# Altium PCB Ocarina.PcbDoc
Units mm, origin at the board's own origin, x right, y up, seen from the top; angles counter-clockwise.
Board outline 70.25 x 24.75 mm, 2 copper layers (Top Layer, Bottom Layer), stack 1.571 mm thick; 49 components, 40 nets, 176 pads, 40 vias.
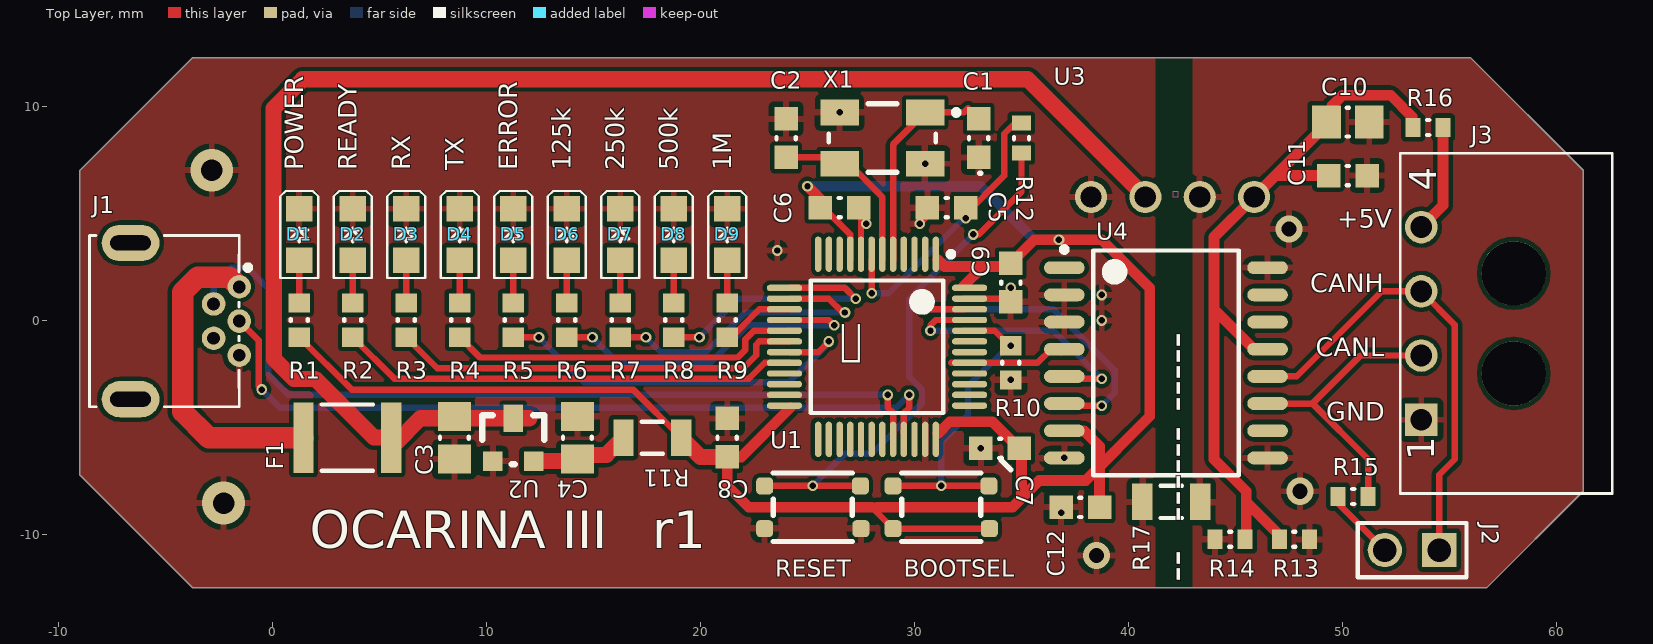
[diagram p0: Top Layer view]
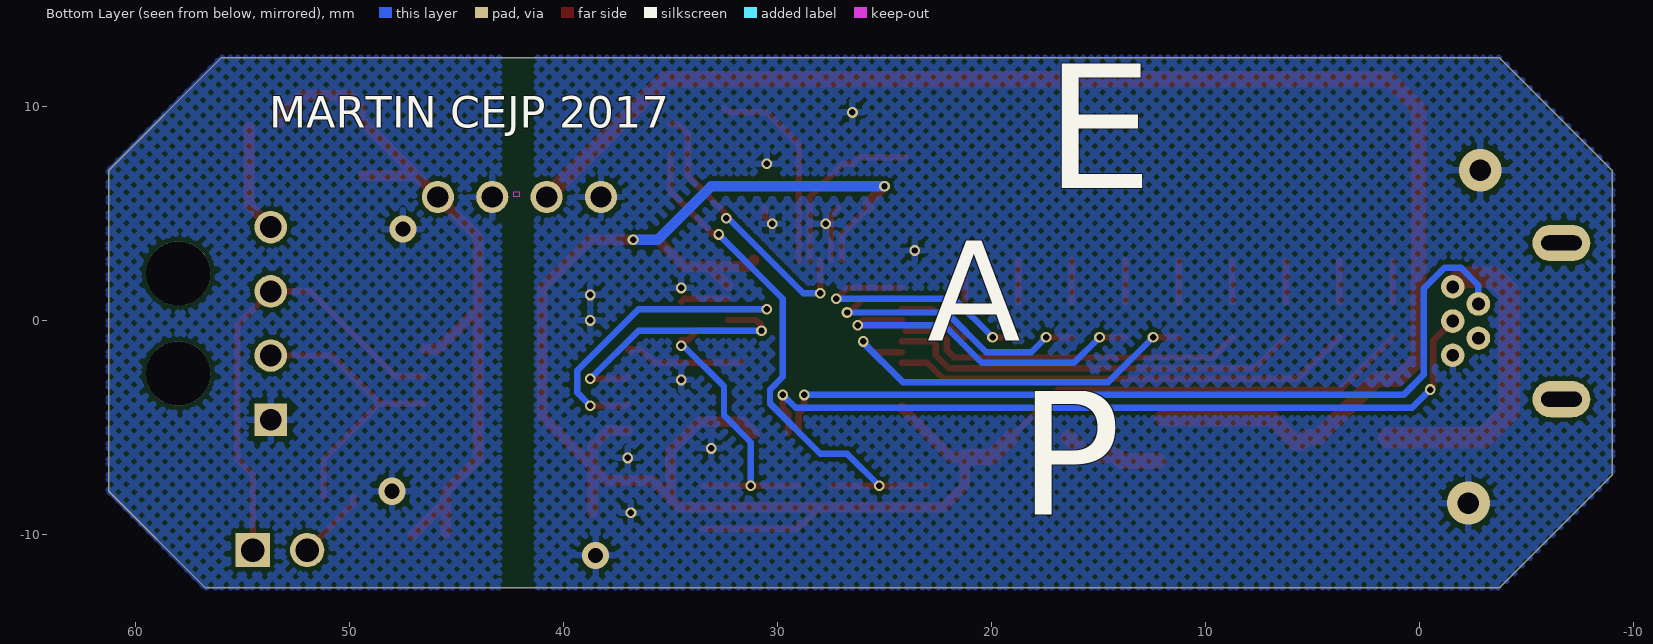
[diagram p1: Bottom Layer view, seen from below]

## Layer stack, top to bottom
Top Solder: solder mask 0.0102, Solder Resist, Dk 3.5
Top Layer: signal copper 0.0356
Dielectric 1: dielectric 1.5, FR-4, Dk 4.8
Bottom Layer: signal copper 0.0356
Bottom Solder: solder mask 0.0102, Solder Resist, Dk 3.5

## Board outline
-3.75,-12.5 -9,-7.25 -9,7 -3.75,12.25 56,12.25 61.25,7 61.25,-8 56.75,-12.5

## Design rules (kind name [scope] priority, off if disabled: settings)
Clearance [All] p1: gap=0.2 ignorepadtopadclearanceinfootprint=FALSE except(0: Arc-Hole Track-Hole SMDPad-Hole THPad-Hole Via-Hole Fill-Hole Poly-Hole Region-Hole Text-Hole)
HoleSize [All] p1: absolutevalues=TRUE maxlimit=6.4 minlimit=0.2 maxpercent=80.000 minpercent=20.000
HoleToHoleClearance [All] p1: gap=0.1 allowstackedmicrovias=TRUE
MinimumSolderMaskSliver [All] p1: minsoldermaskwidth=0.01
PolygonConnect [All] p1: connectstyle=Relief reliefconductorwidth=0.3 reliefentries=4 polygonreliefangle="90 Angle" airgapwidth=0.254
RoutingVias [All] p1: holewidth=0.3 width=0.5 viastyle="Through Hole" minholewidth=0.3 minwidth=0.5 maxholewidth=0.711 maxwidth=1.27
SilkToSilkClearance [All] p1: silktosilkclearance=0.01
SilkToSolderMaskClearance [IsPad] p1: minsilkscreentomaskgap=0.01 clearancetoexposedcopper=TRUE
SolderMaskExpansion [All] p1: expansion=0.102
Width [All] p1: maxlimit=1 minlimit=0.3 preferedwidth=0.3 minimp=50.000000 maximp=50.000000 favimp=50.000000
25 further rules are at their usual default settings.

## Classes and differential pairs
component class 2_IsoCAN: C10 C11 C12 J2 J3 R13 R14 R15 R16 R17 U3 U4
component class 1_Main: BOOTSEL C1 C2 C3 C4 C5 C6 C7 C8 C9 D1 D2 D3 D4 D5 D6 D7 D8 D9 F1 J1 R1 R2 R3 R4 R5 R6 R7 R8 R9 R10 R11 R12 RESET U1 U2 X1

## Components (designator, comment, footprint, x,y, rotation, side; value= is the part's Value field where it differs from the comment)
BOOTSEL "430181038816" BUTTON_4x3x2 31.25,-8.75 r0 top
C1 "18p" CAPC0603(1608)100_M 33,8.5 r90 top value=18pF
C2 "18p" CAPC0603(1608)100_M 24,8.5 r270 top value=18pF
C3 "4.7uF" CAPC0805(2012)155_M 8.5,-5.5 r90 top
C4 "4.7uF" CAPC0805(2012)155_M 14.25,-5.5 r270 top
C5 "100n" CAPC0603(1608)100_M 31.5,5.25 r0 top value=100nF
C6 "100n" CAPC0603(1608)100_M 26.5,5.25 r0 top value=100nF
C7 "100n" CAPC0603(1608)100_M 34,-6 r180 top value=100nF
C8 "100n" CAPC0603(1608)100_M 21.25,-5.5 r90 top value=100nF
C9 "100n" CAPC0603(1608)100_M 34.5,1.75 r270 top value=100nF
C10 "1uF" CAPC0805(2012)145_M 50.25,9.25 r180 top
C11 "100n" CAPC0603(1608)100_M 50.25,6.75 r180 top value=100nF
C12 "100n" CAPC0603(1608)100_M 37.75,-8.75 r0 top value=100nF
D1 "green" 0805LEDG 1.25,4 r90 top
D2 "green" 0805LEDG 3.75,4 r90 top
D3 "yellow" 0805LEDYell 6.25,4 r90 top
D4 "yellow" 0805LEDYell 8.75,4 r90 top
D5 "red" 0805LEDR 11.25,4 r90 top
D6 "blue" 0805LEDB 13.75,4 r90 top
D7 "blue" 0805LEDB 16.25,4 r90 top
D8 "blue" 0805LEDB 18.75,4 r90 top
D9 "blue" 0805LEDB 21.25,4 r90 top
F1 "500 mA" RESC1812(4532)_L 3.5,-5.5 r0 top value="1.02 Ohm"
J1 "651005136521" MOLEX_548190519 -1.55,-0.05 r90 top
J2 "02p" 61300211121 53.25,-10.75 r180 top
J3 "WE-3.00 mm Micro Power Connector 66200411022" 66200411022 53.68,-0.16 r90 top
R1 "470R" RESC0603(1608)_N 1.25,0 r270 top value="470.00 Ohm"
R2 "470R" RESC0603(1608)_N 3.75,0 r270 top value="470.00 Ohm"
R3 "470R" RESC0603(1608)_N 6.25,0 r90 top value="470.00 Ohm"
R4 "470R" RESC0603(1608)_N 8.75,0 r90 top value="470.00 Ohm"
R5 "470R" RESC0603(1608)_N 11.25,0 r90 top value="470.00 Ohm"
R6 "470R" RESC0603(1608)_N 13.75,0 r90 top value="470.00 Ohm"
R7 "470R" RESC0603(1608)_N 16.25,0 r90 top value="470.00 Ohm"
R8 "470R" RESC0603(1608)_N 18.75,0 r90 top value="470.00 Ohm"
R9 "470R" RESC0603(1608)_N 21.25,0 r90 top value="470.00 Ohm"
R10 "10K" RESC0603(1608)_N 34.5,-2 r90 top value="10000.00 Ohm"
R11 "0R1 1%" RESC1206(3216)_L 17.75,-5.5 r0 top value="1.10 Ohm"
R12 "100R" RESC0603(1608)_L 35,8.5 r270 top value="100.00 Ohm"
R13 "500R" RESC0603(1608)_L 47.75,-10.25 r180 top value="120.00 Ohm"
R14 "500R" RESC0603(1608)_L 44.75,-10.25 r0 top value="120.00 Ohm"
R15 "120R" RESC0603(1608)_L 50.5,-8.25 r180 top value="120.00 Ohm"
R16 "0R" RESC0603(1608)_L 54,9 r0 top value="0.00 Ohm"
R17 "1M 1kV" RESC1206(3216)_L 42,-8.5 r0 top value="1000000.00 Ohm"
RESET "430181038816" BUTTON_4x3x2 25.25,-8.75 r0 top
U1 "STM32F042C6T6" STM-LQFP48_M 28.25,-1.25 r270 top locked
U2 "3V3" SOT23m 10.3,-6.59 r0 top
U3 "WE FISM 177920511" FISM_17792XXX1 42.06,5.75 r0 top
U4 "ADM3054BRWZ" SOIC127P1030X265-16N 41.75,-2 r0 top
X1 "ABM3B-12.000MHZ-B2-T" ABRA-ABM3B-4_V 28.5,8.5 r180 top

## Footprints (in the part's own frame and the unit in brackets; to place one, negate y for a bottom-side part, rotate by r counter-clockwise, add the part's x,y. Pads: shape width x height; smd on the part's side, far side on the other; paste and mask are expansions set on the pad)
0805LEDB [mm]
  rect 1.2x1.25 smd: A(-1.2,0) K(1.2,0)
  silkscreen extent -2.03,-0.89 2.03,0.89, body extent -1.01,-0.63 1.01,0.62, height 1.1
0805LEDG [mm]
  rect 1.2x1.25 smd: A(-1.2,0) K(1.2,0)
  silkscreen extent -2.03,-0.89 2.03,0.89, body extent -1.01,-0.63 1.01,0.62, height 1.11
0805LEDR [mm]
  rect 1.2x1.25 smd: A(-1.2,0) K(1.2,0)
  silkscreen extent -2.03,-0.89 2.03,0.89, body extent -1.01,-0.63 1.01,0.62, height 1.1
0805LEDYell [mm]
  rect 1.2x1.25 smd: A(-1.2,0) K(1.2,0)
  silkscreen extent -2.03,-0.89 2.03,0.89, body extent -1.01,-0.62 1.01,0.63, height 1.1
61300211121 [mm] "2 pins, 1 row, straight, gold plating"
  rect 1.6x1.6 hole 1.1: 1(-1.27,0)
  round 1.6 hole 1.1: 2(1.27,0)
  silkscreen extent -2.54,-1.27 2.54,1.27, body extent -2.54,-1.27 2.54,1.27, height 8.57
66200411022 [mm] "Single row Right angle header With plastic peg 04p"
  rect 1.52x1.52 hole 1.02: 1(-4.5,0)
  round 1.52 hole 1.02: 2(-1.5,0) 3(1.5,0) 4(4.5,0)
  round 3 hole 3 unplated: ""(-2.34,-4.32) ""(2.34,-4.32)
  silkscreen extent -7.95,-8.92 7.95,0.98, body extent -7.82,-8.92 7.83,0.98, height 5.59
ABRA-ABM3B-4_V [mm] "SMD, 4-Leads, Body 5x3.2mm"
  rect 1.8x1.2 smd: 1(-2,-1.2) 2(2,-1.2) 3(2,1.2) 4(-2,1.2)
  silkscreen extent -3.58,-1.6 2.5,1.6, body extent -2.5,-1.59 2.5,1.59, height 1.13
BUTTON_4x3x2 [mm]
  rrect50% 0.8x0.8 smd: 1(-2.25,1) 2(2.225,1) 3(-2.25,-1) 4(2.25,-1)
  silkscreen extent -1.85,-1.6 1.85,1.6, body extent -1.85,-1.6 1.85,1.6, height 2
CAPC0603(1608)100_M [mm] "Chip Capacitor, Body 1.6x0.8mm, Height 1.0mm, IPC Low Density"
  rect 1.1x1.1 smd: 1(-0.9,0) 2(0.9,0)
  silkscreen extent -0.05,-0.45 0.05,0.45, body extent -0.87,-0.47 0.88,0.48, height 1
CAPC0805(2012)145_M [mm] "Chip Capacitor, Body 2.0x1.2mm, Height 1.45mm, IPC Low Density"
  rect 1.35x1.55 smd: 1(-1,0) 2(1,0)
  silkscreen extent -0.05,-0.67 0.05,0.67, body extent -1.1,-0.72 1.1,0.72, height 1.45
CAPC0805(2012)155_M [mm] "Chip Capacitor, Body 2.0x1.2mm, Height 1.55mm, IPC Low Density"
  rect 1.35x1.55 smd: 1(-1,0) 2(1,0)
  silkscreen extent -0.05,-0.67 0.05,0.67, body extent -1.1,-0.72 1.1,0.72, height 1.55
FISM_17792XXX1 [mm]
  round 1.5 hole 1: 1(-3.81,0) 2(-1.27,0) 3(1.27,0) 4(3.81,0)
  Keep-Out Layer region: 0,0 0.254,0 0.254,0.254 0,0.254
  body extent -5.75,-1.25 5.75,4.75, height 10
MOLEX_548190519 [mm] "5 pins"
  round 1.1 hole 0.6: 1(1.6,0) 2(0.8,1.2) 3(0,0) 4(-0.8,1.2) 5(-1.6,0)
  oval 1.7x2.7 hole 0.7 slot 1.9 at 90 deg: Shell(-3.65,5.08) Shell(3.65,5.08)
  silkscreen extent -4,-0.52 4,7, body extent -4.07,-0.13 4.07,8.7, height 3.91
RESC0603(1608)_L [mm] "Chip Resistor, Body 1.6x0.8mm, IPC High Density"
  rect 0.7x0.9 smd: 1(-0.7,0) 2(0.7,0)
  silkscreen extent -0.05,-0.35 0.05,0.35, body extent -0.85,-0.47 0.85,0.47, height 0.6
RESC0603(1608)_N [mm] "Chip Resistor, Body 1.6x0.8mm, IPC Medium Density"
  rect 0.9x1 smd: 1(-0.8,0) 2(0.8,0)
  silkscreen extent -0.05,-0.4 0.05,0.4, body extent -0.85,-0.47 0.85,0.47, height 0.6
RESC1206(3216)_L [mm] "Chip Resistor, Body 3.2x1.6mm, IPC High Density"
  rect 0.95x1.7 smd: 1(-1.35,0) 2(1.35,0)
  silkscreen extent -0.5,-0.75 0.5,0.75, body extent -1.67,-0.87 1.67,0.87, height 0.75
RESC1812(4532)_L [mm] "Chip Resistor, Body 4.5x3.2mm, IPC High Density"
  rect 0.95x3.3 smd: 1(-2.05,0) 2(2.05,0)
  silkscreen extent -1.2,-1.55 1.2,1.55, body extent -2.35,-1.7 2.35,1.7, height 0.71
SOIC127P1030X265-16N [mm] "SOIC, 16-Leads, Body 10,30x7,50mm, Pitch 1,27mm, IPC Medium Density"
  oval 1.9x0.6 smd: 1(-4.75,4.445) 2(-4.75,3.175) 3(-4.75,1.905) 4(-4.75,0.635) 5(-4.75,-0.635) 6(-4.75,-1.905) 7(-4.75,-3.175) 8(-4.75,-4.445) 9(4.75,-4.445) 10(4.75,-3.175) 11(4.75,-1.905) 12(4.75,-0.635) 13(4.75,0.635) 14(4.75,1.905) 15(4.75,3.175) 16(4.75,4.445)
  silkscreen extent -4.87,-5.25 3.4,5.42, body extent -3.8,-5.25 3.8,5.25, height 2.65
SOT23m [mil]
  rect 35.98x35.98 smd: 1(0,0)
  rect 36x36 smd: 2(74.8,0)
  rect 36x50 smd: 3(37.4,78.74)
  silkscreen extent -20,-6 94,84, body extent -20,-7 95,91, height 37
STM-LQFP48_M [mm] "QFP, 48-Leads, Body 7x7mm, Pitch 0.5mm, IPC Low Density"
  oval 1.65x0.3 smd: 1(-4.325,2.75) 2(-4.325,2.25) 3(-4.325,1.75) 4(-4.325,1.25) 5(-4.325,0.75) 6(-4.325,0.25) 7(-4.325,-0.25) 8(-4.325,-0.75) 9(-4.325,-1.25) 10(-4.325,-1.75) 11(-4.325,-2.25) 12(-4.325,-2.75) 25(4.325,-2.75) 26(4.325,-2.25) 27(4.325,-1.75) 28(4.325,-1.25) 29(4.325,-0.75) 30(4.325,-0.25) 31(4.325,0.25) 32(4.325,0.75) 33(4.325,1.25) 34(4.325,1.75) 35(4.325,2.25) 36(4.325,2.75)
  oval 0.3x1.65 smd: 13(-2.75,-4.325) 14(-2.25,-4.325) 15(-1.75,-4.325) 16(-1.25,-4.325) 17(-0.75,-4.325) 18(-0.25,-4.325) 19(0.25,-4.325) 20(0.75,-4.325) 21(1.25,-4.325) 22(1.75,-4.325) 23(2.25,-4.325) 24(2.75,-4.325) 37(2.75,4.325) 38(2.25,4.325) 39(1.75,4.325) 40(1.25,4.325) 41(0.75,4.325) 42(0.25,4.325) 43(-0.25,4.325) 44(-0.75,4.325) 45(-1.25,4.325) 46(-1.75,4.325) 47(-2.25,4.325) 48(-2.75,4.325)
  silkscreen extent -4.45,-3.1 3.1,3.58, body extent -3.5,-3.5 3.5,3.5, height 1.6

## Part data
BOOTSEL RESET: library part "WS-TASV, 430181038816", "WS-TASV 4.5x4.5 mm SMD", Manufacturer="Wurth Elektronik", ComponentLink1Description=Manufacturer, ComponentLink1URL=http://www.we-online.de, ComponentLink2Description=Datasheet, ComponentLink2URL=http://katalog.we-online.de/em/datasheet/430181038816.pdf, Created by="Baojun Chen", Created Date=Dec.2015, partNo=430181038816
C1 C2: library part CMP-1035-00733-1, "CAP 18pF 10V ±10% 0603 (1608 Metric) Thickness 1mm SMD", Case-EIA=0603, Case-Metric=1608, Rated Voltage="10 V", Tolerance=±10%, Max Thickness="1 mm", Technology=SMT
C3 C4: library part CMP-1036-04892-1, "CAP 4.7uF 16V ±20% 0805 (2012 Metric) Thickness 1.55mm SMD", Case-EIA=0805, Case-Metric=2012, Rated Voltage="16 V", Tolerance=±20%, Max Thickness="1.55 mm", Technology=SMT
C5 C6 C7 C8 C9 C11 C12: library part CMP-1035-02576-1, "CAP 100nF 6.3V ±10% 0603 (1608 Metric) Thickness 1mm SMD", Case-EIA=0603, Case-Metric=1608, Rated Voltage="6.3 V", Tolerance=±10%, Max Thickness="1 mm", Technology=SMT
C10: library part CMP-1036-04748-1, "CAP 1uF 16V ±20% 0805 (2012 Metric) Thickness 1.45mm SMD", Case-EIA=0805, Case-Metric=2012, Rated Voltage="16 V", Tolerance=±20%, Max Thickness="1.45 mm", Technology=SMT
D1 D2: library part LEDG_0805
D3 D4: library part LEDYell_0805
D5: library part LEDR_0805
D6 D7 D8 D9: library part LEDB_0805
F1: library part CMP-1016-00152-1, "1R02 0.75W 1% 1812 (4532 Metric)  SMD", Case-EIA=1812, Case-Metric=4532, Power="0.75 W", Tolerance="1 %", Technology=SMT
J1: "WR-COM Mini USB 2.0 Type B Horizontal 5 Contacts", ComponentLink1Description=Manufacturer, ComponentLink1URL=http://www.we-online.de, ComponentLink2Description=Datasheet, ComponentLink2URL=http://katalog.we-online.de/em/datasheet/651005136521.pdf, PartNumber=651005136521, Published="June 2016", Publisher="Wurth Elektronik"
J2: library part 61300211121, "WR-PHD 2.54 mm THT Pin Header, 02p", ComponentLink1Description=Manufacturer, ComponentLink1URL=http://www.we-online.de, ComponentLink2Description=Datasheet, ComponentLink2URL=http://katalog.we-online.de/em/datasheet/6130xx11121.pdf, PartNumber=61300211121, PinNumber=02p, PublishedDate="July 2016", Publisher="Wurth Elektronik"
J3: "WR-MPC3 3.00 mm Male Single Row Angled Header", Manufacturer="W¨¹rth Elektronik eiSos GmbH", partNo=66200411022, ComponentLink1 Description=Manufacturer, ComponentLink1URL=http://www.we-online.com, ComponentLink2 Description=Datasheet, ComponentLink2URL=http://katalog.we-online.de/em/datasheet/6620xx11022.pdf, Created by="Karrer Zheng", Created Date="28 August 2013", NoPins=04
R1 R2 R3 R4 R5 R6 R7 R8 R9: library part CMP-1012-00066-1, "470R 0.1W 5% 0603 (1608 Metric)  SMD", Case-EIA=0603, Case-Metric=1608, Power="0.1 W", Tolerance="5 %", Technology=SMT
R10: library part CMP-1012-00098-1, "10K 0.1W 5% 0603 (1608 Metric)  SMD", Case-EIA=0603, Case-Metric=1608, Power="0.1 W", Tolerance="5 %", Technology=SMT
R11: library part CMP-1014-00003-1, "0R1 0.25W 1% 1206 (3216 Metric)  SMD", Case-EIA=1206, Case-Metric=3216, Power="0.25 W", Tolerance="5 %", Technology=SMT
R12: library part CMP-1012-00050-1, "100R 0.1W 5% 0603 (1608 Metric)  SMD", Case-EIA=0603, Case-Metric=1608, Power="0.1 W", Tolerance="5 %", Technology=SMT
R13 R14 R15: library part CMP-1012-00052-1, "120R 0.1W 5% 0603 (1608 Metric)  SMD", Case-EIA=0603, Case-Metric=1608, Power="0.1 W", Tolerance="5 %", Technology=SMT
R16: library part CMP-1012-00052-1, "0R 0.1W 5% 0603 (1608 Metric)  SMD", Case-EIA=0603, Case-Metric=1608, Power="0.1 W", Tolerance="5 %", Technology=SMT
R17: library part CMP-1014-00146-1, "1M 0.25W 5% 1206 (3216 Metric)  SMD", Case-EIA=1206, Case-Metric=3216, Power="0.25 W", Tolerance="5 %", Technology=SMT
U1: library part CMP-0304-00103-1, "ARM Cortex-M0 32-bit MCU, 32 KB Flash, 6 KB Internal RAM, 38 I/Os, 48-Pin LQFP, -40 to 85 degC, Tray", I/Os (High Current)=38, Operating Frequency(F) (Processor speed) (MHz)=48, Package Description="48-Pin Low Profile Quad Flat Package, Body 7 x 7 mm, Pitch 0.5 mm", Package Reference=LQFP48, Supply Voltage(Vcc) min (V)=2, ComponentLink1Description="Manufacturer URL", ComponentLink1URL=http://www.st.com/, ComponentLink2Description=Datasheet, ComponentLink2URL=http://www.st.com/st-web-ui/static/active/en/resource/technical/document/datasheet/DM00105814.pdf, Core="ARM Cortex-M0", DatasheetVersion="Rev. 5", FLASH Size (Prog) (kB)=32, Internal RAM Size (kB)=6, Mounting Technology="Surface Mount", Packing=Tray
U2: library part LM1117DT-3.3NOPB, "1.8V Voltage reference", Alias=MCP1700, Suplier=Farnell
U3: library part 177920511
X1: library part CMP-1688-00007-1, "Ceramic SMD Crystal, 12 MHz, +/- 20 ppm, 70 Ohm, -20 to 70 degC, 4-Pin SMD, RoHS, Tape and Reel", Case\Package=TO-263-4, Dropout Voltage="2 V", Max Input Voltage="25 V", Max Operating Temperature="125 degC", Max Ouput Current="1.5 A", Min Input Voltage="7 V", Min Operating Temperature="0 degC", Nominal Output Voltage="5 V", Package Quantity=500, ComponentLink1Description="Manufacturer URL", ComponentLink1URL=http://www.abracon.com/, ComponentLink2Description=Datasheet, ComponentLink2URL=http://www.abracon.com/Resonators/abm3b.pdf, DatasheetVersion=Aug-15, Mount="Surface Mount", Output Current="1.5 A", Outputs=1, Output Voltage="5 V", PackageDescription="4-Pin Surface Mount Device, Body 5 x 3.2 mm", PackageReference=ABM3B, Packaging="Tape and Reel", Pins=3, Radiation Hardening=No, REACH SVHC="No SVHC", RoHSCompliant=true, Weight="0.050897 oz"

## Via types
v1: diameter 0.5, hole 0.3, Top Layer to Bottom Layer, 35 vias
v2: diameter 1.27, hole 0.711, Top Layer to Bottom Layer, 3 vias
v3: diameter 2, hole 1, Top Layer to Bottom Layer, 2 vias

## Nets (pads, with @x,y where several pads share a name; then routed paths per layer and width w, separated by ;. In a path a pad name is that pad's centre, name@x,y a point inside that pad or via, vN(x,y) a via of type N, cw(c..) or ccw(c..) an arc to the next point about the centre after c; other vN are vias at no path point)
+3V3: BOOTSEL.3 BOOTSEL.4 C6.1 C7.1 C8.1 C9.1 C12.2 R1.2 R11.2 U1.1 U1.9 U1.24 U1.36 U1.48 U4.7 | length 102.8
  Top Layer w0.3: R1.2 3.7,-3.25 16.85,-3.25 R11.2 ; C6.1@25.75,5.25 27,4 U1.9@27,2.8 ; 28,-8.75 28.75,-9.5 BOOTSEL.3@29,-9.5 ; BOOTSEL.3@29,-9.675 29.075,-9.75 BOOTSEL.4
  Top Layer w0.5: U1.24@24.2,-4.1 21.9,-6.4 C8.1 21.25,-7.75 22.25,-8.75 28,-8.75 ; v1(25,6.25) 25.75,5.5 C6.1@25.75,5.25 ; 28.25,-8.75 34.576,-8.75 35.826,-7.5 38,-7.5 41,-4.5 41,1.5 38.75,3.75 v1(36.75,3.75) 35.6,3.75 C9.1 34.35,2.5 33.2,2.5 ; U1.36@31.1,-5.3 31.65,-4.75 33.65,-4.75 C7.1 34.9,-6.056 35,-6.156 35,-8.25 ; U1.1@31.1,2.8 31.4,2.5 33.2,2.5 ; U1.48@32.3,1.6 33.2,2.5 ; U4.7 37.925,-5.175 38.65,-5.9 C12.2@38.65,-9
  Top Layer w0.75: R11.2 20,-6.4 C8.1
  Bottom Layer w0.5: v1(25,6.25) 33.1,6.25 35.6,3.75 v1(36.75,3.75)
BOOTSEL: BOOTSEL.1 BOOTSEL.2 R10.2 U1.44 | length 14.7
  Top Layer w0.3: BOOTSEL.1 v1(31.25,-7.75) BOOTSEL.2 ; U1.44@32.3,-0.5 33.75,-0.5 34.2,-0.95 R10.2@34.5,-0.95
  Bottom Layer w0.3: v1(31.25,-7.75) 31.25,-5.707 32.5,-4.457 32.5,-3.1 v1@34.4,-1.2
  other v1: 34.5,-1.2
CAN_RX: U1.45 U4.5 | length 12.6
  Top Layer w0.3: v1(30.75,-0.5) 30.75,-0.25 31,0 U1.45@32.3,0 ; U4.5 37.115,-2.75 v1(38.75,-2.75)
  Bottom Layer w0.3: v1(30.75,-0.5) 36.5,-0.5 v1(38.75,-2.75)
CAN_TX: U1.46 U4.6 | length 15.5
  Top Layer w0.3: v1(30.5,0.5) U1.46@32.3,0.5 ; U4.6 37.095,-4 v1(38.75,-4)
  Bottom Layer w0.3: v1(30.5,0.5) 36.5,0.5 39.35,-2.35 39.35,-3.4 v1(38.75,-4)
CANH: J2.1 J3.3 U4.12 | length 21.9
  Top Layer w0.3: U4.12 47.865,-2.635 51.84,1.34 J3.3 55.25,-0.23 55.25,-6.5 54.52,-7.23 J2.1
CANL: J3.2 R15.1 U4.11 | length 13.5
  Top Layer w0.3: U4.11 48.595,-3.905 ; R15.1 51.2,-6.51 48.595,-3.905 ; J3.2 50.84,-1.66 48.595,-3.905
GND: C1.1 C2.1 C3.1 C4.1 C5.1 C6.2 C7.2 C8.2 C9.2 C12.1 D1.K D2.K D3.K D4.K D5.K D6.K D7.K D8.K D9.K J1.5 R10.1 R17.1 RESET.3 RESET.4 U1.8 U1.23 U1.35 U1.47 U2.1 U3.1 U4.2 U4.3 U4.8 X1.2 X1.4 | length 5.8
  Top Layer w0.3: C6.2@27.15,5.25 27.5,4.9 U1.8@27.5,2.8 ; v1(30.25,4.5) 30.6,4.85 C5.1 ; U1.47@32.3,1 34.35,1 C9.2
  other v1: 36.85,-9 37,-6.445 33.1,-6 34.5,-2.8 38.75,-0.019 38.75,1.171 34.5,1.5 23.587,3.25 27.75,4.5 30.5,7.3 26.5,9.7
  other v2: 38.5,-11
  other v3: -2.284,-8.556 -2.837,7
ISO5V: C10.2 C11.2 R13.2 R14.2 R16.1 U3.4 U4.13 | length 35.5
  Top Layer w0.5: R14.2@45.5,-9.95 45.5,-8 44,-6.5 44,0.5 ; 45.5,-8.5 R13.2@47.05,-10.05 ; U4.13 45.865,-1.365 44,0.5 ; C11.2 46.87,6.75 ; R16.1@53.25,9.25 53.25,9.5 52.25,10.5 50,10.5 49.5,10 49.5,9.3 49.45,9.25 49.37,9.25 46.87,6.75 ; 44,0.5 44,3.88 U3.4 46.87,6.75
ISO_SENSE: U1.41 U4.4 | length 5.7
  Top Layer w0.3: 31.718,-2 35.75,-2 36.385,-1.365 U4.4 U4.4@36.865,-1.5
ISOGND: C10.1 C11.1 J3.1 R13.1 R14.1 R17.2 U3.3 U4.9 U4.16
  other v2: 48.014,-8 47.506,4.25
LED_BAUD1M: R9.1 U1.15 | length 3.5
  Top Layer w0.3: R9.1 21.45,-0.8 22.75,0.5 U1.15@24.2,0.5
LED_BAUD125K: R6.1 U1.16 | length 15.9
  Top Layer w0.3: R6.1 v1(14.95,-0.8) ; U1.16@24.2,0 26,0 v1(26.25,-0.25)
  Bottom Layer w0.3: v1(14.95,-0.8) 16.15,-2 20.457,-2 22.207,-0.25 v1(26.25,-0.25)
LED_BAUD250K: R7.1 U1.14 | length 14.4
  Top Layer w0.3: R7.1 v1(17.45,-0.8) ; U1.14@24.2,1 26,1 26.65,0.35 v1(26.75,0.35)
  Bottom Layer w0.3: v1(17.45,-0.8) 18.15,-1.5 20.25,-1.5 22.1,0.35 v1(26.75,0.35)
LED_BAUD500K: R8.1 U1.13 | length 12.5
  Top Layer w0.3: R8.1 v1(19.95,-0.8) ; U1.13@24.2,1.5 26.75,1.5 v1(27.25,1)
  Bottom Layer w0.3: v1(19.95,-0.8) 21.75,1 v1(27.25,1)
LED_ERROR: R5.1 U1.19 | length 18.5
  Top Layer w0.3: R5.1 v1(12.45,-0.8) ; U1.19@24.2,-1.5 25.5,-1.5 v1(26,-1)
  Bottom Layer w0.3: v1(12.45,-0.8) 14.55,-2.9 24.15,-2.9 26.05,-1 v1(26,-1)
LED_READY: R2.2 U1.20 | length 21.6
  Top Layer w0.3: R2.2 5.7,-2.75 22.25,-2.75 23,-2 U1.20@24.2,-2
LED_RX: R3.1 U1.18 | length 19.4
  Top Layer w0.3: R3.1 7.7,-2.25 22,-2.25 22.6,-1.65 22.6,-1.15 22.75,-1 U1.18@24.2,-1
LED_TX: R4.1 U1.17 | length 16.5
  Top Layer w0.3: R4.1 9.7,-1.75 21.745,-1.75 22.1,-1.395 22.1,-0.9 22.5,-0.5 U1.17@24,-0.5
NetC4_2: C4.2 R11.1 U2.2 | length 4.7
  Top Layer w0.75: U2.2 13.96,-6.59 14.25,-6.3 15.6,-6.3 R11.1
NetC5_2: C5.2 R12.1 U1.7 | length 13.3
  Top Layer w0.3: v1(28,1.25) U1.7@28,2.8 ; v1(32.4,4.75) 32.3,4.85 34.2,6.75 34.2,8.7 34.65,9.15 R12.1@35,9.15
  Bottom Layer w0.3: v1(28,1.25) 28.8,1.25 32.4,4.85 v1(32.4,4.75)
NetD1_A: D1.A R1.1 | length 2
  Top Layer w0.3: R1.1 D1.A
NetD2_A: D2.A R2.1 | length 2
  Top Layer w0.3: R2.1 D2.A
NetD3_A: D3.A R3.2 | length 2
  Top Layer w0.3: R3.2 D3.A
NetD4_A: D4.A R4.2 | length 2
  Top Layer w0.3: R4.2 D4.A
NetD5_A: D5.A R5.2 | length 2
  Top Layer w0.3: R5.2 D5.A
NetD6_A: D6.A R6.2 | length 2
  Top Layer w0.3: R6.2 D6.A
NetD7_A: D7.A R7.2 | length 2
  Top Layer w0.3: R7.2 D7.A
NetD8_A: D8.A R8.2 | length 2
  Top Layer w0.3: R8.2 D8.A
NetD9_A: D9.A R9.2 | length 2
  Top Layer w0.3: R9.2 D9.A
NetF1_1: F1.1 J1.1 | length 14.9
  Top Layer w1: J1.1 -2,2 -3.5,2 -4.2,1.3 -4.2,-4.28 -2.98,-5.5 F1.1
NetJ2_2: J2.2 R15.2 | length 3.4
  Top Layer w0.3: R15.2 49.8,-8.57 J2.2
NetJ3_4: J3.4 R16.2 | length 5.1
  Top Layer w0.5: J3.4 54.7,5.36 R16.2
NRST: R12.2 RESET.1 RESET.2 | length 25.4
  Top Layer w0.3: RESET.1 v1(25.25,-7.75) RESET.2 ; v1(32.75,4) 33,4 35,6 R12.2@35,7.75
  Bottom Layer w0.3: v1(25.25,-7.75) 26.75,-6.25 28,-6.25 30.35,-3.9 30.35,-3.251 29.75,-2.651 29.75,1 v1(32.75,4)
OSC_IN: C1.2 U1.5 X1.1 | length 9.6
  Top Layer w0.3: U1.5@29,2.8 29,8.2 X1.1 32.3,9.7 C1.2@32.5,9.9
OSC_OUT: C2.2 U1.6 X1.3 | length 8.2
  Top Layer w0.3: C2.2 26.2,7.6 X1.3 26.95,7.3 28.5,5.75 U1.6@28.5,2.8
SWCLK: U1.37
SWDIO: U1.34
USB_DM: J1.2 U1.32 | length 39.9
  Top Layer w0.3: v1(28.75,-3.5) 28.75,-4.093 29,-4.343 U1.32@29,-5.3
  Bottom Layer w0.3: J1.2@-2.45,0.45 J1.2 -2.75,1.623 -1.923,2.45 -1.177,2.45 -0.2,1.472 -0.2,-2.55 0.75,-3.5 v1(28.75,-3.5)
USB_DP: J1.3 U1.33 | length 36.4
  Top Layer w0.3: J1.3 -0.65,-0.95 -0.65,-3.1 v1(-0.5,-3.25) ; U1.33@29.5,-5.3 29.5,-4.343 29.75,-4.093 v1(29.75,-3.5)
  Bottom Layer w0.3: v1(-0.5,-3.25) 0.35,-4.1 29.15,-4.1 v1(29.75,-3.5)
USBVCC: C3.2 F1.2 U2.3 U3.2 | length 69.3
  Top Layer w0.6: F1.2@5.55,-5.75 F1.2@5.75,-5.75
  Top Layer w0.75: F1.2@5.55,-5.75 5.3,-5.5 4.75,-5.5 2,-2.75 1,-2.75 0.075,-1.825 0.075,1.937 0.05,1.962 0.05,9.887 1.413,11.25 35.29,11.25 U3.2 ; F1.2@5.75,-5.75 6.91,-4.59 12,-4.59
pads on no net: J1.4 J1.Shell J3. U1.2 U1.3 U1.4 U1.10 U1.11 U1.12 U1.21 U1.22 U1.25 U1.26 U1.27 U1.28 U1.29 U1.30 U1.31 U1.38 U1.39 U1.40 U1.42 U1.43 U4.1 U4.10 U4.14 U4.15

## Polygon pours and split planes (outlines as drawn)
ISOGND on Top Layer "ISOGND_L01_P009" (solid, remove dead copper, pour order 9): 43,-12.5 43,12.25 56,12.25 61.25,7 61.25,-8 56.75,-12.5
GND on Top Layer "GND_L01_P008" (solid, remove dead copper, pour order 8): -3.75,-12.5 -9,-7.25 -9,7 -3.75,12.25 41.25,12.25 41.25,-12.5
GND on Bottom Layer "GND_L02_P010" (hatched 45Degree grid 0.508 track 0.3, remove dead copper, pour order 10): -3.75,-12.5 -9,-7.25 -9,7 -3.75,12.25 41.25,12.25 41.25,-12.5
ISOGND on Bottom Layer "ISOGND_L02_P011" (hatched 45Degree grid 0.508 track 0.3, remove dead copper, pour order 11): 43,-12.5 43,12.25 56,12.25 61.25,7 61.25,-8 56.75,-12.5

## Silkscreen, mask and mechanical layers (free items; w line width, h text height)
Top Overlay:
  lines w0.254: 33.05,6.85 33.1,6.85 ; 34.05,-6.45 34.05,-6.55 34.5,-7
  text "POWER" at 1.75,7 h1.5 r90
  text "READY" at 4.25,7 h1.5 r90
  text "RX" at 6.75,7 h1.5 r90
  text "TX" at 9.25,7 h1.5 r90
  text "ERROR" at 11.75,7 h1.5 r90
  text "125k" at 14.25,7 h1.5 r90
  text "250k" at 16.75,7 h1.5 r90
  text "500k" at 19.25,7 h1.5 r90
  text "1M" at 21.75,7 h1.5 r90
  text "+5V" at 49.75,4 h1.5
  text "CANH" at 48.5,1 h1.5
  text "CANL" at 48.75,-2 h1.5
  text "" at 26.5,-2.75 h4
  text "GND" at 49.25,-5 h1.5
  text "OCARINA III" at 1.75,-11.25 h3
  text "r1" at 17.75,-11.25 h3
  text "--  ------ -----" at 42.9,-12.25 h1.52 r90
Bottom Overlay:
  text "MARTIN CEJP 2017" at 53.75,8.5 h2.5
  text "E" at 17.5,4.25 h10
  text "A" at 23,-2.5 h8
  text "P" at 18.75,-11 h10

## Text inside footprints (layer, text, board x,y; h text height)
J3: Top Overlay "4" at 54.38,6.04 h1.27 r90; Top Overlay "1" at 54.28,-6.56 h1.27 r90